# Altium PCB ad_motor.PcbDoc
Units mm, origin at the board's own origin, x right, y up, seen from the top; angles counter-clockwise.
Board outline 64.99 x 56 mm, 2 copper layers (Top Layer, Bottom Layer); 59 components, 74 nets, 303 pads, 77 vias.
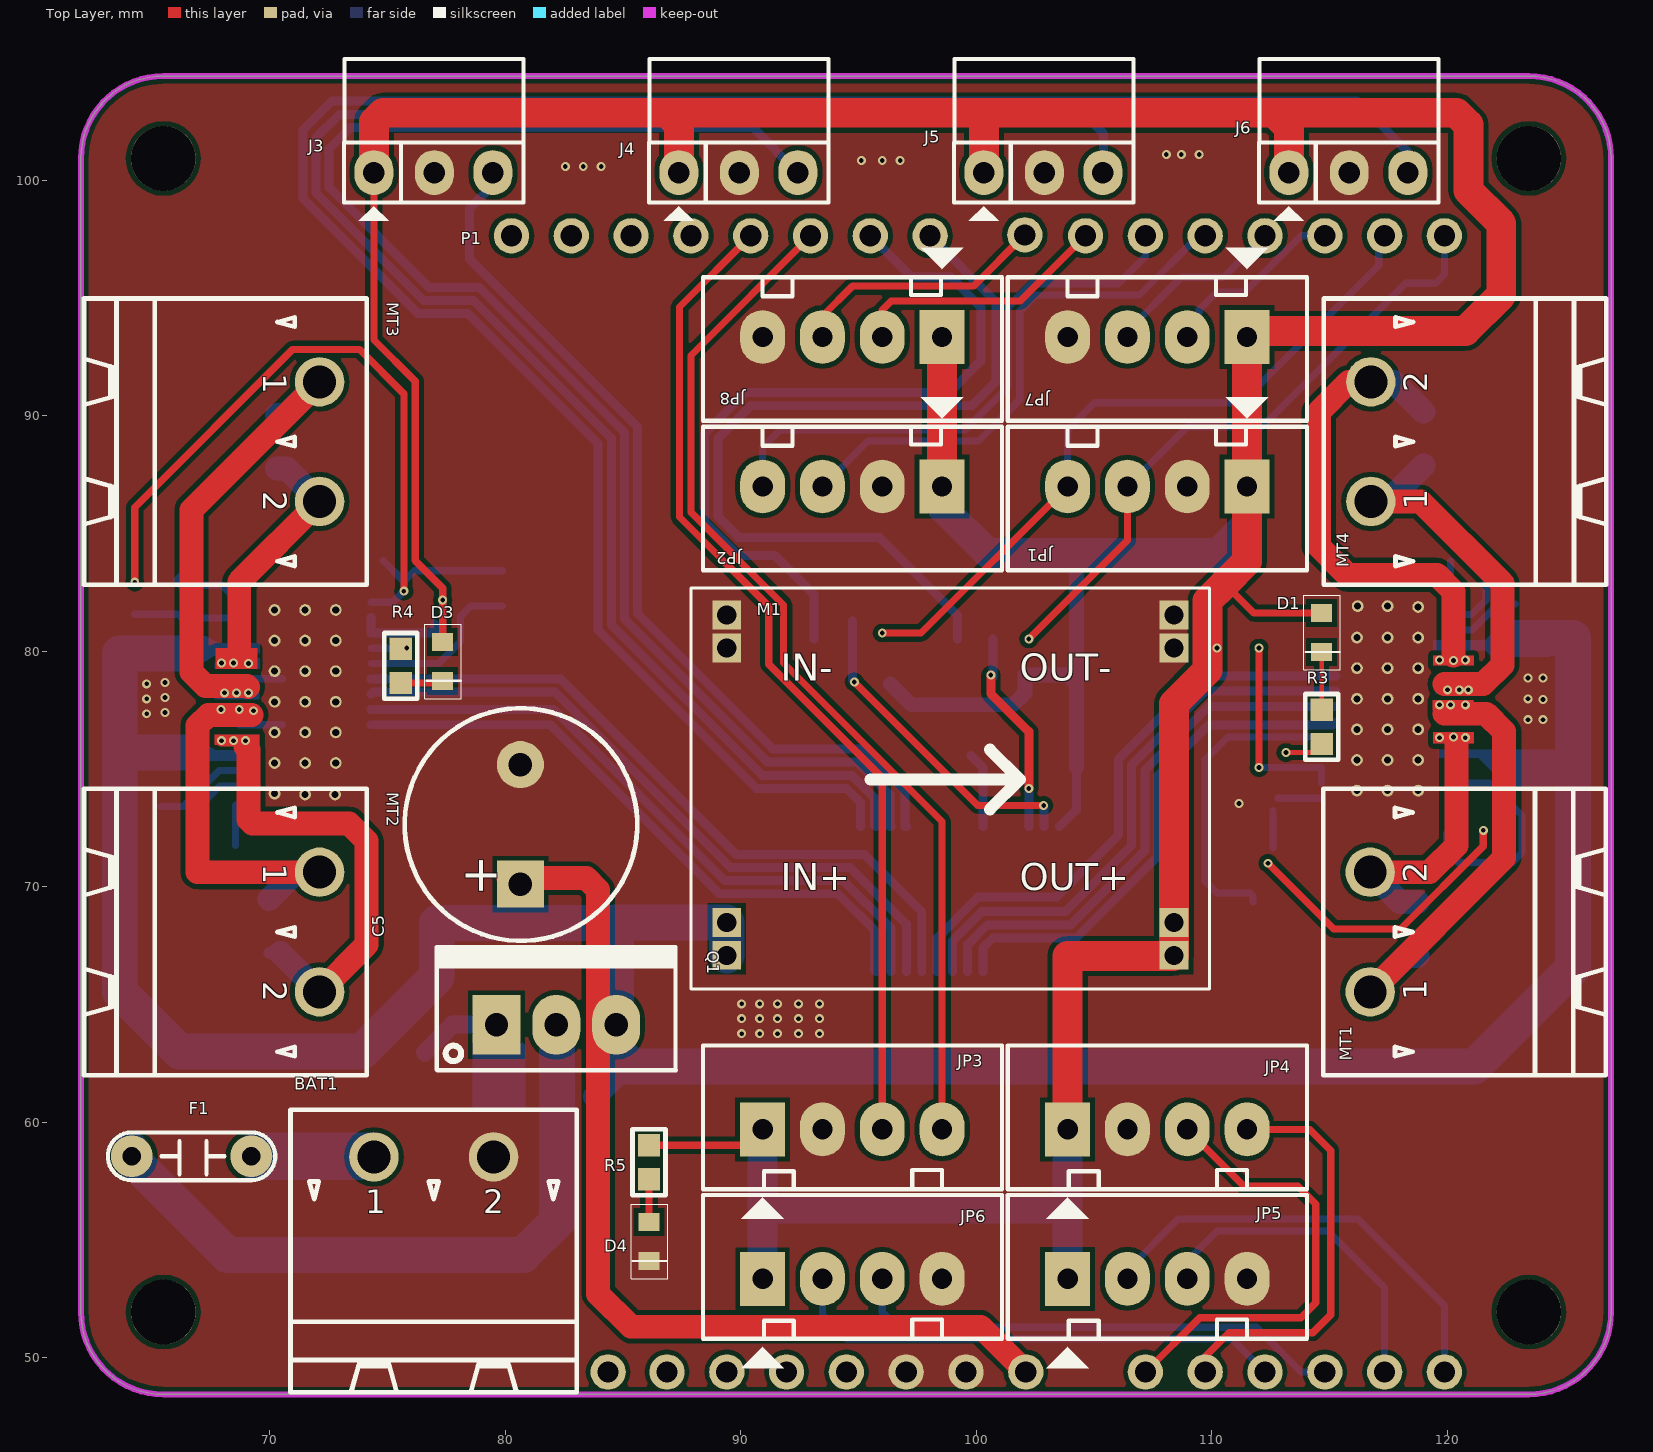
[diagram p0: Top Layer view]
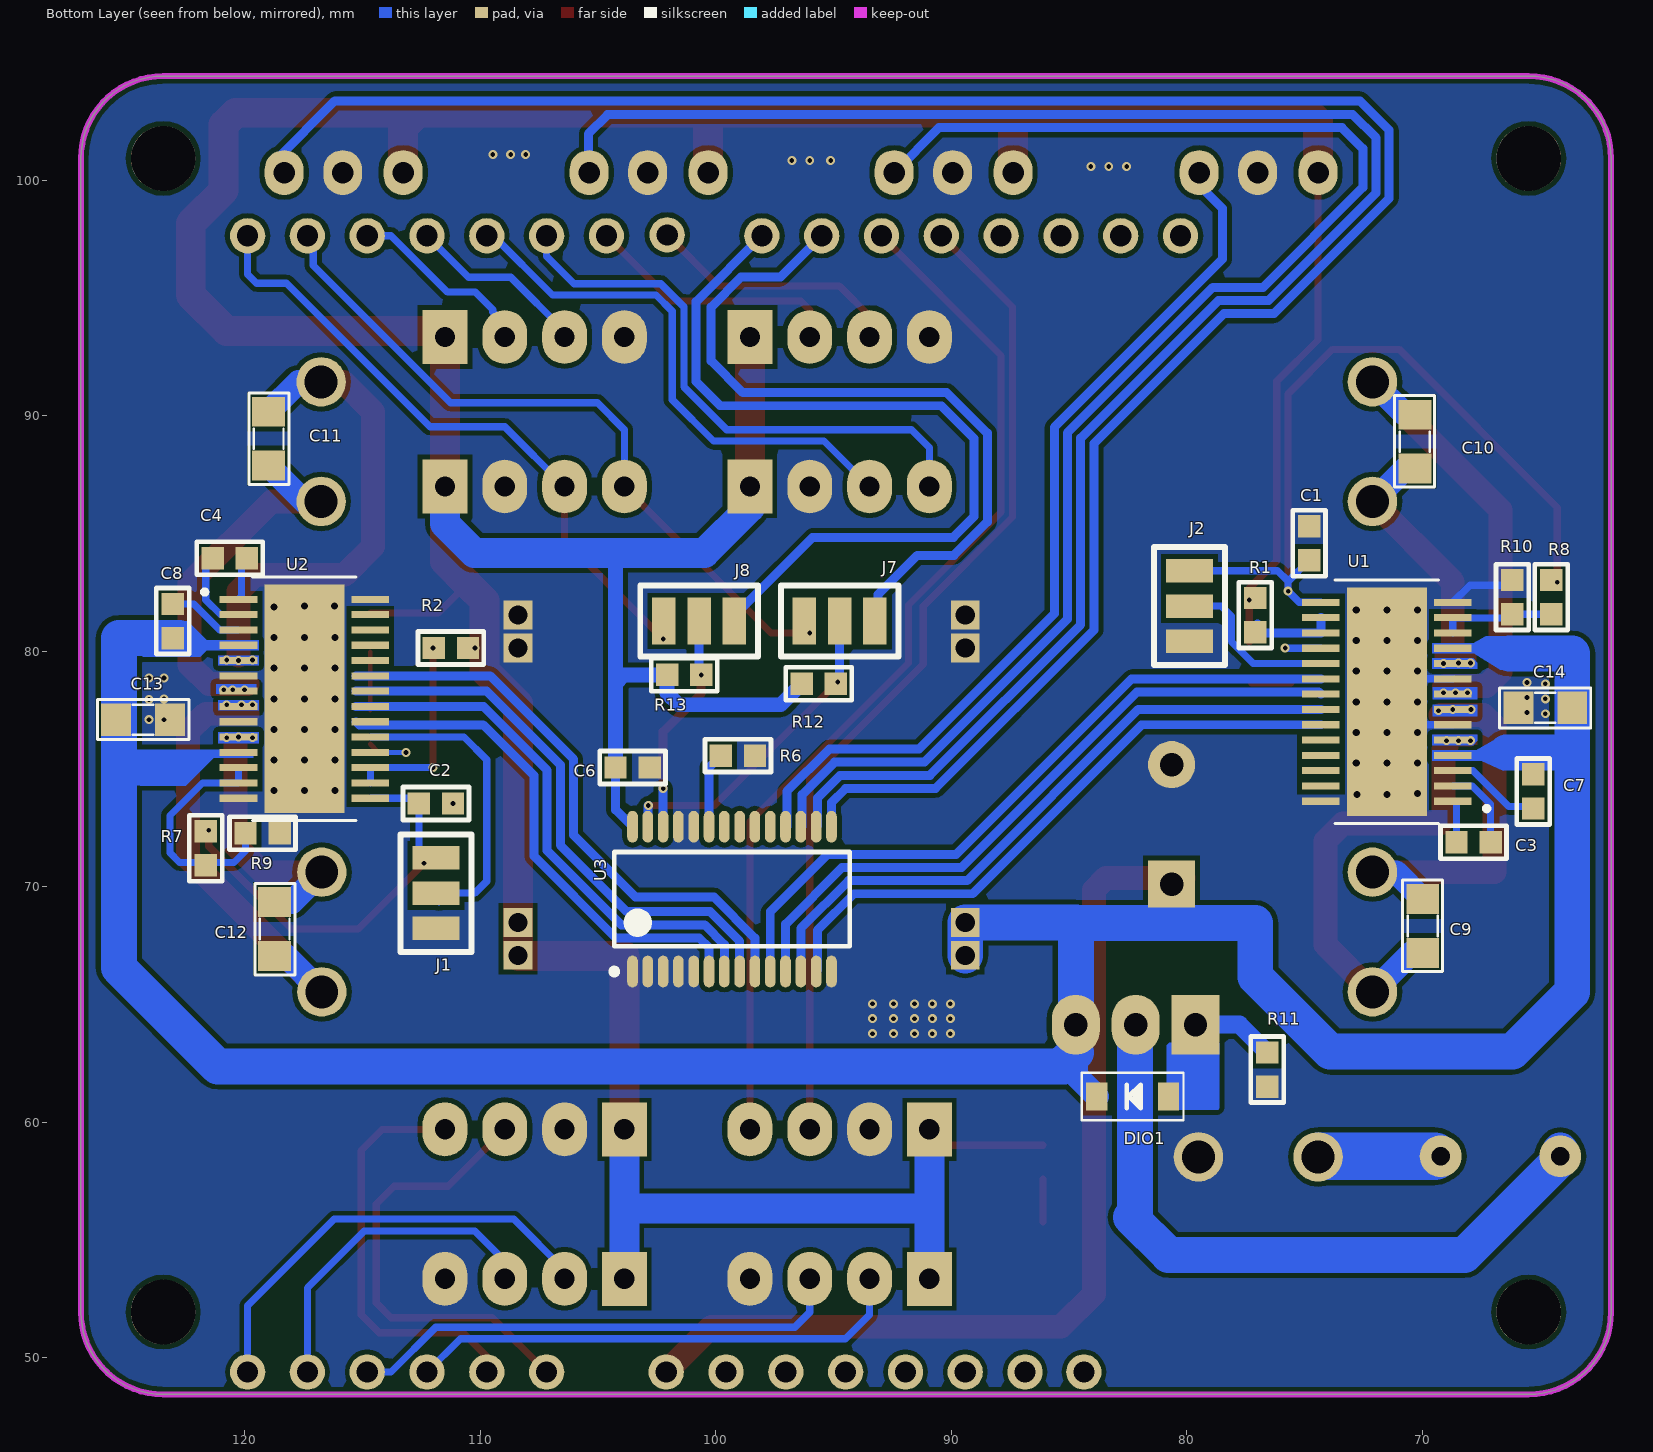
[diagram p1: Bottom Layer view, seen from below]
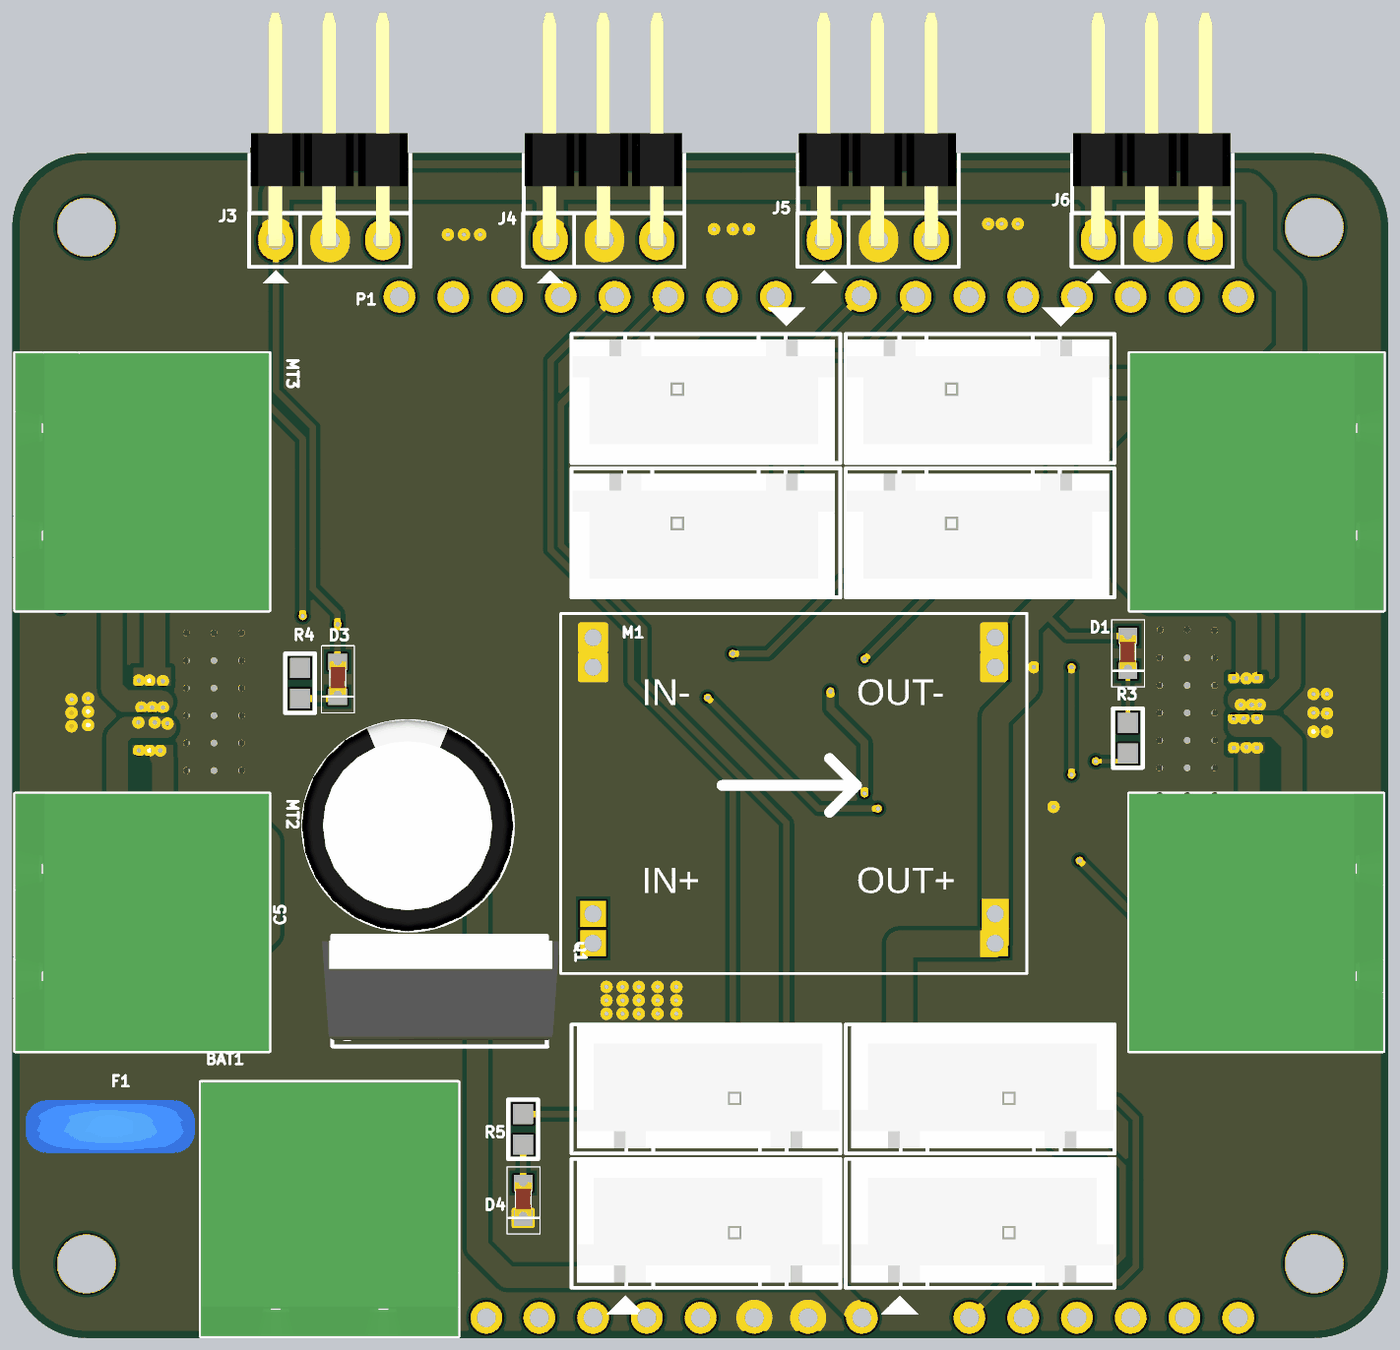
[diagram p2: 3D render of the assembled board from above, using the file's embedded part models]

## Layer stack, top to bottom
Top Solder: solder mask 0.0102, Solder Resist, Dk 3.5
Top Layer: signal copper 0.0356
Dielectric 1: dielectric 0.32, FR-4, Dk 4.8
Bottom Layer: signal copper 0.0356
Bottom Solder: solder mask 0.0102, Solder Resist, Dk 3.5

## Board outline
61.976,51.93 ccw(c65.476,51.93) 65.476,48.43 123.476,48.43 ccw(c123.472,51.926) 126.968,51.93 126.968,100.93 ccw(c123.472,100.934) 123.476,104.43 65.476,104.43 ccw(c65.476,100.93) 61.976,100.93

## Design rules (kind name [scope] priority, off if disabled: settings)
Clearance Clearance_1 [InPolygon] p1: gap=0.203
Clearance [All] p2: gap=0.178
ComponentClearance ComponentClearance_1 [InComponent('p1')] p1: gap=0 collisioncheckmode=3 verticalgap=0 showdistances=FALSE
ComponentClearance [All] p2: gap=0.254 collisioncheckmode=3 verticalgap=0.254 showdistances=FALSE
PolygonConnect [All] p1: connectstyle=Direct reliefconductorwidth=0.508 reliefentries=4 polygonreliefangle="90 Angle" airgapwidth=0.254
RoutingVias [All] p1: holewidth=0.203 width=0.381 viastyle="Through Hole" minholewidth=0.127 minwidth=0.254 maxholewidth=0.711 maxwidth=1.27
SolderMaskExpansion [All] p1: expansion=0.102
Width [All] p1: maxlimit=2.032 minlimit=0.203 preferedwidth=0.305
29 further rules are at their usual default settings.

## Classes and differential pairs
component class CONNECTORS: J7 J8 JP1 JP2 JP3 JP4 JP5 JP6 JP7 JP8 P1
component class H_BRIDGE: C1 C2 C3 C4 C5 C7 C8 C9 C10 C11 C12 C13 C14 D1 D3 J1 J2 MT1 MT2 MT3 MT4 R1 R2 R3 R4 R7 R8 R9 R10 U1 U2
component class power: BAT1 DIO1 F1 M1 Q1 R11
component class VIA_MOTORS: C6 D4 J3 J4 J5 J6 R5 R6 R12 R13 U3

## Components (designator, comment, footprint, x,y, rotation, side; value= is the part's Value field where it differs from the comment)
BAT1 "MOTOR-DC" CON2-5.08DC 74.422,58.547 r0 top locked
C1 "Cap Semi" SMT0603 74.803,84.582 r270 bottom
C2 "Cap Semi" SMT0603 111.887,73.533 r0 bottom
C3 "Cap Semi" SMT0603 67.818,71.882 r0 bottom
C4 "Cap Semi" SMT0603 120.65,83.947 r180 bottom
C5 "Cap Pol 8mm" C10mm 80.645,72.644 r90 top
C6 "Cap Semi" SMT0603 103.535,75.057 r0 bottom
C7 "Cap Semi" SMT0603 65.278,74.041 r270 bottom
C8 "Cap Semi" SMT0603 123.063,81.28 r90 bottom
C9 "104" SM-0805 69.977,68.326 r270 bottom
C10 "104" SM-0805 70.311,88.9 r270 bottom
C11 "104" SM-0805 118.999,89.027 r90 bottom
C12 "104" SM-0805 118.745,68.199 r90 bottom
C13 "104" SM-0805 124.333,77.089 r0 bottom
C14 "103" SM-0805 64.77,77.597 r180 bottom
D1 "LED2_RED" LED_RED_SMD0603 114.675,80.473 r270 top
D3 "LED2_RED" LED_RED_SMD0603 77.343,79.248 r270 top
D4 "LED2_RED" LED_RED_SMD0603 86.106,54.61 r270 top
DIO1 "Diode SMD" DIO-SMD-123 82.296,61.087 r180 bottom
F1 "5A 30V FUSE" CN2 69.215,58.547 r180 top
J1 "JUMPER-SOLDER-3WAY-BOTTOM" JUMPER-SOLDER-3WAY-BOTTOM 111.887,69.723 r270 top
J2 "JUMPER-SOLDER-3WAY-BOTTOM" JUMPER-SOLDER-3WAY-BOTTOM 79.883,81.915 r270 top
J3 "EXTERN-SERVO" JP3H 74.422,100.33 r0 top
J4 "EXTERN-SERVO" JP3H 87.376,100.33 r0 top
J5 "EXTERN-SERVO" JP3H 100.33,100.33 r0 top
J6 "EXTERN-SERVO" JP3H 113.284,100.33 r0 top
J7 "JUMPER-SOLDER-3WAY-BOTTOM" JUMPER-SOLDER-3WAY-BOTTOM 94.742,81.28 r0 top
J8 "JUMPER-SOLDER-3WAY-BOTTOM" JUMPER-SOLDER-3WAY-BOTTOM 100.711,81.28 r0 top
JP1 "JP4" CON4 111.506,86.995 r180 top
JP2 "JP4" CON4 98.552,86.995 r180 top
JP3 "JP4" CON4 90.932,59.69 r0 top
JP4 "JP4" CON4 103.886,59.69 r0 top
JP5 "JP4" CON4 103.886,53.34 r0 top
JP6 "JP4" CON4 90.932,53.34 r0 top
JP7 "JP4" CON4 111.506,93.345 r180 top
JP8 "JP4" CON4 98.552,93.345 r180 top
M1 "MP1584-dc-brick-pcb Step down Input: 4.5V - 28V Ouput 0.8V - 25V max. 3A Cheap on ebay" DC-BRICK 87.884,65.659 r0 top
MT1 "MOTOR-DC" CON2-5.08DC 116.713,65.532 r90 top
MT2 "MOTOR-DC" CON2-5.08DC 72.136,70.612 r270 top locked
MT3 "MOTOR-DC" CON2-5.08DC 72.136,91.44 r270 top locked
MT4 "MOTOR-DC" CON2-5.08DC 116.738,86.36 r90 top
P1 "ArduinoHeader" Arduino_header 100.076,73.533 r0 top locked
Q1 "A \"typical\" P chan Mosfet" QTO-220 79.629,64.135 r0 top
R1 "Resistor" SMT0603 77.089,81.534 r90 bottom
R2 "Resistor" SMT0603 111.252,80.137 r180 bottom
R3 "Resistor" SMT0603 114.675,76.783 r90 top
R4 "Resistor" SMT0603 75.565,79.375 r270 top
R5 "Resistor" SMT0603 86.106,58.293 r90 top
R6 "Resistor" SMT0603 99.06,75.565 r0 bottom
R7 "Resistor" SMT0603 121.666,71.628 r90 bottom
R8 "Resistor" SMT0603 64.516,82.296 r90 bottom
R9 "Resistor" SMT0603 119.253,72.263 r0 bottom
R10 "Resistor" SMT0603 66.167,82.296 r270 bottom
R11 "Resistor" SMT0603 76.581,62.23 r90 bottom
R12 "Resistor" SMT0603 95.631,78.613 r0 bottom
R13 "Resistor" SMT0603 101.346,78.994 r0 bottom
U1 "DRV8841PWPR" IC_TPS61196PWPRQ1 71.501,77.851 r0 bottom
U2 "DRV8841PWPR" IC_TPS61196PWPRQ1 117.475,77.978 r180 bottom
U3 "PCA9685-TSSOP28" TSSOP28-SMD 99.315,69.469 r90 bottom

## Footprints (in the part's own frame and the unit in brackets; to place one, negate y for a bottom-side part, rotate by r counter-clockwise, add the part's x,y. Pads: shape width x height; smd on the part's side, far side on the other; paste and mask are expansions set on the pad)
Arduino_header [mm] "Base for Arduino-like boards."
  round 1.5 hole 0.9: 0(19.812,24.11) 1(-15.708,-24.15) 1(17.272,24.11) 2(14.732,24.11) 3(12.192,24.11) 3v3(-8.128,-24.15) 4(9.652,24.11) 5(7.112,24.11) 5V(-5.588,-24.15) 6(4.572,24.11) 7(1.992,24.15) 8(-2.032,24.11) 9(-4.572,24.11) 10(-7.112,24.11) 11(-9.652,24.11) 12(-12.192,24.11) 13(-14.732,24.11) 14(-17.272,24.11) A0(7.112,-24.15) A1(9.652,-24.15) A2(12.192,-24.15) A3(14.732,-24.15) A4(17.272,-24.15) A5(19.812,-24.15) AREF(-19.812,24.11) GND(-3.048,-24.15) GND(-0.508,-24.15) IOREF(-13.208,-24.15) RESET(-10.668,-24.15) VIN(2.032,-24.15)
C10mm [mm]
  rect 2x2 hole 1: 1(-2.54,0)
  round 2 hole 1: 2(2.54,0)
  silkscreen extent -4.95,-4.96 4.93,4.92, body extent -5,-5 4.97,5, height 20.01
CN2 [mil]
  round 70 hole 31: 1(0,0) 2(200,0)
  silkscreen extent -40,-40 240,40, body extent -54,-44 260,55, height 407
CON2-5.08DC [mm] "PHOENIX MSTBA Serie, Pitch 5.08mm, 12A, 250V, 2 Positions Header"
  round 2.1 hole 1.4: 1(0,-0.025) 2(5.08,-0.025)
  silkscreen extent -3.54,-10.03 8.62,1.97, body extent -3.54,-10.02 8.62,1.98, height 8.6
CON4 [mil] "CON4"
  rect 75x90 hole 34: 1(0,0)
  oval 75x90 hole 34: 2(100,0) 3(200,0) 4(300,0)
  silkscreen extent -100,-150 400,140, body extent -90,-90 398,136, height 276
DC-BRICK [mil]
  rect 48x48 hole 32: 1(60,570) 1(60,625) 2(60,56) 2(60,111) 3(808,56) 3(808,111) 4(808,570) 4(808,625)
  silkscreen extent 0,0 867,670
DIO-SMD-123 [mm]
  rect 0.9x1.2 smd: 1(1.524,0) 2(-1.524,0)
  silkscreen extent -2.16,-1.02 2.16,1.02, body extent -1.76,-0.8 1.94,0.8, height 1.25
IC_TPS61196PWPRQ1 [mm]
  rect 1.6x0.3 smd paste-2 mask+0: 1(-2.8,4.225) 2(-2.8,3.575) 3(-2.8,2.925) 4(-2.8,2.275) 5(-2.8,1.625) 6(-2.8,0.975) 7(-2.8,0.325) 8(-2.8,-0.325) 9(-2.8,-0.975) 10(-2.8,-1.625) 11(-2.8,-2.275) 12(-2.8,-2.925) 13(-2.8,-3.575) 14(-2.8,-4.225) 15(2.8,-4.225) 16(2.8,-3.575) 17(2.8,-2.925) 18(2.8,-2.275) 19(2.8,-1.625) 20(2.8,-0.975) 21(2.8,-0.325) 22(2.8,0.325) 23(2.8,0.975) 24(2.8,1.625) 25(2.8,2.275) 26(2.8,2.925) 27(2.8,3.575) 28(2.8,4.225)
  round 0.5 hole 0.3 mask+0: 14(-1.3,-3.9) 14(-1.3,-2.6) 14(-1.3,-1.3) 14(-1.3,0) 14(-1.3,1.3) 14(-1.3,2.6) 14(-1.3,3.9) 14(0,-3.9) 14(0,-2.6) 14(0,-1.3) 14(0,0) 14(0,1.3) 14(0,2.6) 14(0,3.937) 14(1.27,3.937) 14(1.3,-3.9) 14(1.3,-2.6) 14(1.3,-1.3) 14(1.3,0) 14(1.3,1.3) 14(1.3,2.6)
  rect 3.4x9.7 smd paste-6 mask+0: 14(0,0)
  silkscreen extent -4.34,-5.17 2.2,5.17, body extent -3.3,-4.9 3.3,4.9, height 1.2
JP3H [mil]
  oval 65x75 hole 36: 1(0,0) 2(101,0) 3(199,0)
  silkscreen extent -50,-81 250,190, body extent -47,-15 245,424, height 99
JUMPER-SOLDER-3WAY-BOTTOM [mm] "3WAY SOLDER JUMPER BOTTOM LAYER"
  rect 1x2 smd far side: 0(-1.5,0) 1(0,0) 2(1.5,0)
LED_RED_SMD0603 [mil] "Compoment SMD 60x30mil"
  rect 30x35 smd: 1(-45,0) 2(20,0)
  silkscreen extent -75,-30 50,31, body extent -46,-16 17,16, height 24
QTO-220 [mil] "TO-220 - 1-2-3"
  rect 80x100 hole 39: 1(0,0)
  oval 80x100 hole 39: 2(100,0) 3(200,0)
  silkscreen extent -100,-76 300,130, body extent -119,-64 322,121, height 755
SM-0805 [mil] "Compoment SMD 80x50mil"
  rect 50x55 smd: 1(-45,0) 2(45,0)
  silkscreen extent -77,-34 76,33, body extent -40,-27 40,23, height 24
SMT0603 [mm]
  rect 0.95x0.95 smd: 1(-0.725,0) 2(0.725,0)
  silkscreen extent -1.4,-0.7 1.4,0.7, body extent -1.02,-0.45 1.03,0.45, height 2.65
TSSOP28-SMD [mm] "TSOP, 28-Leads, Body 9.80x4.55mm, Pitch 0.65mm, IPC Medium Density"
  oval 1.35x0.45 smd: 1(-3.075,4.225) 2(-3.075,3.575) 3(-3.075,2.925) 4(-3.075,2.275) 5(-3.075,1.625) 6(-3.075,0.975) 7(-3.075,0.325) 8(-3.075,-0.325) 9(-3.075,-0.975) 10(-3.075,-1.625) 11(-3.075,-2.275) 12(-3.075,-2.925) 13(-3.075,-3.575) 14(-3.075,-4.225) 15(3.075,-4.225) 16(3.075,-3.575) 17(3.075,-2.925) 18(3.075,-2.275) 19(3.075,-1.625) 20(3.075,-0.975) 21(3.075,-0.325) 22(3.075,0.325) 23(3.075,0.975) 24(3.075,1.625) 25(3.075,2.275) 26(3.075,2.925) 27(3.075,3.575) 28(3.075,4.225)
  silkscreen extent -3.2,-5 2,5.13, body extent -3.25,-5 3.25,5, height 1.1

## Part data
C1 C2: library part CAP-SM-0603-X5R-4.7uF, "CAP SM 0603 X5R 4.7uF 10%"
C3 C4: library part CAP-SM-0603-X5R-10uF, "CAP SM 0603 X5R 10uF 10%"
C5: "Polarized Capacitor (Axial)"
C6: library part CAP-SM-0603-X7R-1uF, "CAP SM 0603 X7R 1uF 10%"
C7 C8: library part CAP-SM-0603-X7R-100nF, "CAP SM 0603 X7R 100nF 10%"
C9 C10 C11 C12 C13 C14: library part CM, "Cap SMD"
D1 D3 D4: library part LED2_RED-0603/200mA-2V, "LED RED CLEAR 0603 SMD"
DIO1: "Default Diode"
F1: library part CN2, "Cap np 104 => 105pF"
JP1 JP2 JP3 JP4 JP5 JP6 JP7 JP8: library part Con4, "Connector 4"
M1: library part MP1584
Q1: library part IRF840, "MOSFET N - CHANNEL 500V - 0.75 - 8A - TO-220"
R1 R2 R6 R7 R8 R9 R10 R12 R13: library part RES-SM-0603-10K, "RES SM 0603 10K"
R3 R4 R5: library part RES-SM-0603-1K, "RES SM 0603 1K"
R11: library part RES-SM-0603-100K, "RES SM 0603 100K"

## Free pads (board coordinates)
  round 2.75 hole 2.75: ""(65.476,51.93) ""(65.476,100.93) ""(123.476,51.93) ""(123.476,100.93)

## Via types
v1: diameter 0.381, hole 0.203, Top Layer to Bottom Layer, 77 vias

## Nets (pads, with @x,y where several pads share a name; then routed paths per layer and width w, separated by ;. In a path a pad name is that pad's centre, name@x,y a point inside that pad or via, vN(x,y) a via of type N, cw(c..) or ccw(c..) an arc to the next point about the centre after c; other vN are vias at no path point)
3.3V_H1: C1.2 J2.0 R8.2 U1.15 | length 34.2
  Top Layer w0.305: v1(64.262,82.931) 64.262,86.106 70.976,92.82 73.804,92.82 75.692,90.932 v1(75.692,82.55)
  Bottom Layer w0.305: U1.15 75.218,82.076 v1(75.692,82.55) 75.692,82.968 ; C1.2 75.692,82.968 ; J2.0 76.139,83.415 75.692,82.968
3.3V_H2: C2.2 J1.0 R7.2 U2.15 | length 15.9
  Top Layer w0.305: v1(112.395,70.993) 115.189,68.199 118.025,68.199 121.539,71.713 v1(121.539,72.39)
  Bottom Layer w0.305: J1.0@112.612,71.654 C2.2@112.612,73.239 ; C2.2@112.832,73.753 U2.15
5V: C6.2 D1.1 D3.1 J3.1 J4.1 J5.1 J6.1 JP1.1 JP2.1 JP3.1 JP4.1 JP5.1 JP6.1 JP7.1 JP8.1 M1.3 R1.2 R2.2 R5.2 R12.2 R13.2 U3.28 | length 215.5
  Top Layer w0.305: J3.1 74.422,93.218 76.175,91.465 76.175,83.845 77.343,82.677 v1(77.343,82.169) D3.1 ; R5.2 JP3.1@90.26,59.018 ; 110.553,82.867 111.805,81.616 D1.1
  Top Layer w1.27: J3.1 74.422,102.489 74.803,102.87 86.868,102.87 ; J4.1 87.376,102.362 86.868,102.87 ; JP2.1 JP8.1 ; J5.1 100.33,102.87 ; JP4.1 103.886,67.056 108.382,67.056 108.407,67.081 108.407,68.478 108.407,77.768 109.83,79.191 109.83,82.144 110.553,82.867 111.506,83.82 JP1.1 JP7.1 111.76,93.599 120.777,93.599 122.301,95.123 122.301,98.171 120.904,99.568 120.904,102.362 120.396,102.87 112.649,102.87 ; J6.1@113.284,100.838 113.284,102.235 112.649,102.87 ; 86.868,102.87 100.33,102.87 ; 100.33,102.87 112.649,102.87
  Bottom Layer w0.381: U3.28 104.26,73.264 C6.2
  Bottom Layer w0.635: R12.2 97.245,77.724 101.571,77.724 102.071,78.224 R13.2 103.886,78.994 104.26,78.62 ; C6.2 104.26,83.909 104.521,84.17
  Bottom Layer w1.27: JP6.1 JP3.1 ; 90.983,56.337 103.886,56.337 ; JP2.1 98.552,86.106 100.488,84.17 104.521,84.17 110.261,84.17 111.506,85.416 JP1.1 ; JP5.1 103.886,56.337 ; JP4.1 103.886,56.337
  other v1: 110.227,80.137
DECAY_1: J2.1 U1.19 | length 7.2
  Bottom Layer w0.305: U1.19 77.173,79.476 78.105,80.408 78.105,81.486 78.534,81.915 J2.1
DECAY_2: J1.1 U2.19 | length 13.1
  Bottom Layer w0.305: J1.1@111.76,69.342 111.76,69.596 111.633,69.723 110.236,69.723 109.728,70.231 109.728,75.387 110.694,76.353 U2.19
GND: BAT1.2 C1.1 C2.1 C5.2 C6.1 C13.1 C14.1 D4.2 J1.2 J2.2 J3.2 J4.2 J5.2 J6.2 JP1.2 JP2.2 JP3.2 JP4.2 JP5.4 JP6.4 JP7.4 JP8.4 M1.1 M1.4 P1.GND R6.1 R9.1 R10.1 R11.1 U1.6 U1.9 U1.14 U1.28 U2.6 U2.9 U2.14 U2.28 U3.1 U3.2 U3.3 U3.4 U3.5 U3.14 U3.24 U3.25 | length 6.7
  Bottom Layer w0.305: R10.1@66.04,83.021 R10.1@66.204,83.185 ; R10.1@66.204,82.804 67.973,82.804 U1.14@68.701,82.076 ; U1.6 U1.14@70.526,76.876 ; U1.9 U1.14@70.526,78.826
  other v1: 90.043,63.754 90.805,63.754 91.567,63.754 92.456,63.754 93.345,63.754 90.043,64.389 90.805,64.389 91.567,64.389 92.456,64.389 93.345,64.389 90.043,65.024 90.805,65.024 91.567,65.024 92.456,65.024 93.345,65.024 111.162,73.533 123.444,77.089 124.079,77.089 64.77,77.343 65.551,77.399 124.079,77.953 64.77,77.978 123.444,77.978 65.551,78.034 64.77,78.613 65.551,78.669 123.444,78.867 124.079,78.867 82.55,100.584 83.312,100.584 84.074,100.584 95.123,100.838 96.012,100.838 96.774,100.838 108.077,101.092 108.712,101.092 109.474,101.092
IO0: JP7.3 P1.3 | length 7.8
  Bottom Layer w0.305: JP7.3 106.426,93.599 108.712,95.885 110.51,95.885 P1.3
IO2: JP7.2 P1.2 | length 8
  Bottom Layer w0.305: JP7.2 108.966,93.904 109.474,94.412 109.474,94.513 110.211,95.25 111.403,95.25 113.796,97.643 P1.2
IO4: JP2.3 P1.4 | length 22.9
  Bottom Layer w0.305: JP2.3 95.402,88.925 100.101,88.925 101.854,90.678 101.854,94.441 102.536,95.123 106.934,95.123 109.454,97.643 P1.4
IO5: JP3.4 P1.10 | length 44.5
  Top Layer w0.305: P1.10 87.884,92.563 87.884,85.899 91.821,81.962 91.821,79.502 98.552,72.771 JP3.4
IO12: JP6.3 P1.A3 | length 21.3
  Bottom Layer w0.305: JP6.3 96.012,51.918 96.647,51.283 111.896,51.283 113.796,49.383 P1.A3
IO13: JP5.3 P1.A4 | length 14.2
  Bottom Layer w0.305: JP5.3 108.966,54.102 110.236,55.372 114.935,55.372 117.348,52.959 P1.A4
IO14: JP6.2 P1.A2 | length 21.3
  Bottom Layer w0.305: JP6.2 93.472,51.816 94.488,50.8 110.851,50.8 P1.A2
IO15: JP5.2 P1.A5 | length 19.1
  Bottom Layer w0.305: JP5.2 106.426,53.721 108.585,55.88 116.205,55.88 119.888,52.197 P1.A5
IO16: P1.14
IO17: P1.AREF
IO18: P1.13
IO19: P1.12
IO21: J7.0 P1.9 | length 32.8
  Bottom Layer w0.381: J7.0@93.115,80.518 93.115,82.399 91.44,84.074 89.888,84.074 88.468,85.494 88.468,89.258 90.193,90.983 98.857,90.983 100.203,92.329 100.203,94.615 98.933,95.885 97.262,95.885 P1.9
IO22: J8.0 P1.8 | length 36.4
  Bottom Layer w0.381: P1.8 100.838,94.849 100.838,91.445 99.817,90.424 90.424,90.424 89.027,89.027 89.027,85.725 89.916,84.836 95.885,84.836 99.211,81.51 J8.0@99.211,80.518
IO23: JP3.3 P1.11 | length 42.8
  Top Layer w0.305: P1.11 87.401,94.62 87.401,85.7 91.193,81.908 91.193,79.448 96.012,74.629 JP3.3
IO25: JP2.4 P1.5 | length 24.1
  Bottom Layer w0.305: JP2.4 90.932,88.646 91.694,89.408 99.538,89.408 101.359,91.229 101.359,94.628 102.337,95.606 106.02,95.606 107.188,96.774 P1.5
IO26: JP8.2 P1.6 | length 11.1
  Top Layer w0.305: JP8.2 96.012,94.488 96.393,94.869 101.874,94.869 P1.6
IO27: JP8.3 P1.7 | length 10.9
  Top Layer w0.305: JP8.3 93.472,94.234 94.742,95.504 99.889,95.504 P1.7
IO34: J8.2 JP1.3 P1.0 | length 27.1
  Top Layer w0.305: v1(102.235,80.518) 106.426,84.709 JP1.3
  Bottom Layer w0.305: J8.2@102.211,80.518 v1(102.235,80.518) ; JP1.3 108.966,89.535 112.141,89.535 118.237,95.631 119.507,95.631 119.888,96.012 P1.0
IO35: J7.2 JP1.4 P1.1@117.348,97.643 | length 30.3
  Top Layer w0.305: v1(96.012,80.772) 97.663,80.772 JP1.4
  Bottom Layer w0.305: JP1.4 103.886,89.408 105.029,90.551 111.274,90.551 117.099,96.376 117.099,97.394 P1.1@117.348,97.643
IO36: JP4.3 P1.A0 | length 19.4
  Top Layer w0.305: P1.A0 109.494,51.689 113.792,51.689 114.427,52.324 114.427,56.515 113.665,57.277 111.379,57.277 JP4.3
IO39: JP4.4 P1.A1 | length 17.6
  Top Layer w0.305: P1.A1 109.728,50.038 110.744,51.054 114.3,51.054 115.062,51.816 115.062,58.796 114.168,59.69 JP4.4
LED_FAULT_1: R4.1 U1.18 | length 1.5
  Bottom Layer w0.305: U1.18 75.808,80.126 v1(75.819,80.137)
LED_FAULT_2: R3.1 U2.18 | length 3.2
  Top Layer w0.203: v1(113.157,75.692) 114.309,75.692 R3.1
  Bottom Layer w0.203: v1(113.157,75.692) 114.664,75.692 U2.18
M1_OUT_A: C9.2 MT2.2 U1.5 | length 19.7
  Top Layer w0.508: v1(67.952,76.2) v1@69.088,76.2
  Top Layer w1.016: 68.961,75.946 69.088,75.819 69.088,72.86 69.267,72.681 73.369,72.681 74.111,71.939 74.111,67.532 MT2.2
  Bottom Layer w0.508: C9.2 C9.2@70.46,67.183
  Bottom Layer w1.016: C9.2@70.46,67.183 MT2.2
  other v1: 68.453,76.2 68.961,76.2
M1_OUT_B: C9.1 MT2.1 U1.7 | length 16.5
  Top Layer w1.016: 69.215,77.292 67.386,77.292 66.929,76.835 66.929,70.612 MT2.1
  Bottom Layer w1.016: C9.1 71.12,70.612 MT2.1
  other v1: 69.301,77.47 67.926,77.526 68.701,77.526
M2_OUT_A: C10.2 MT3.2 U1.10 | length 11.8
  Top Layer w0.381: v1(67.945,79.502) 69.29,79.502
  Top Layer w1.016: 68.701,80.091 68.701,82.95 MT3.2
  Bottom Layer w1.016: C10.2 70.714,87.757 MT3.2 MT3.2@71.708,86.36
  other v1: 69.088,79.476 68.453,79.502
M2_OUT_B: C10.1 MT3.1 U1.8 | length 19.6
  Top Layer w1.016: 69.07,78.486 69.029,78.527 67.269,78.527 66.675,79.121 66.675,86.004 MT3.1
  Bottom Layer w1.016: C10.1 70.714,90.043 MT3.1
  other v1: 68.072,78.232 68.58,78.232 69.088,78.232
M3_OUT_A: C11.2 MT4.2 U2.5 | length 20.4
  Top Layer w1.016: MT4.2 115.824,91.44 114.554,90.17 114.554,84.455 115.762,83.247 119.572,83.247 120.275,82.544 120.275,79.823
  Bottom Layer w1.016: MT4.2 117.729,91.44 C11.2
  other v1: 120.275,79.603 119.675,79.629 120.777,79.629
M3_OUT_B: C11.1 MT4.1 U2.7 | length 16.2
  Top Layer w1.016: MT4.1 118.872,86.36 122.347,82.885 122.347,79.421 121.53,78.604 119.888,78.604
  Bottom Layer w1.016: MT4.1 117.475,86.36 C11.1
  other v1: 120.015,78.359 120.523,78.359 120.904,78.359
M4_OUT_A: C12.2 MT1.2 U2.10 | length 10.9
  Top Layer w1.016: MT1.2 119.253,70.612 120.396,71.755 120.396,76.012
  Bottom Layer w1.016: MT1.2 118.008,69.342 C12.2
  other v1: 119.675,76.327 120.777,76.327 120.275,76.353
M4_OUT_B: C12.1 MT1.1 U2.8 | length 18.9
  Top Layer w1.016: MT1.1 122.428,71.222 122.428,76.581 121.666,77.343 119.888,77.343
  Bottom Layer w1.016: MT1.1 118.262,67.056 C12.1
  other v1: 119.675,77.724 120.142,77.724 120.777,77.724
MOTOR1_A: U1.21 U3.11 | length 28.9
  Bottom Layer w0.381: U1.21 74.392,78.267 82.106,78.267 89.558,70.815 94.637,70.815 97.04,68.412 U3.11
MOTOR1_B: U1.20 U3.10 | length 30
  Bottom Layer w0.381: U1.20 82.337,78.826 89.789,71.374 95.25,71.374 97.69,68.934 U3.10
MOTOR2_A: U1.22 U3.12 | length 27.8
  Bottom Layer w0.381: U1.22 82.056,77.526 89.326,70.256 94.364,70.256 96.39,68.231 U3.12
MOTOR2_B: U1.23 U3.13 | length 26.8
  Bottom Layer w0.381: U1.23 81.916,76.876 89.095,69.698 94.132,69.698 95.683,68.147 95.683,66.451 U3.13
MOTOR3_A: U2.21 U3.7 | length 23
  Bottom Layer w0.381: U3.7 99.64,67.537 100.48,68.377 104.013,68.377 107.163,71.527 107.163,74.943 109.872,77.653 U2.21 U2.21@115.275,77.653
MOTOR3_B: U2.20 U3.6 | length 22
  Bottom Layer w0.381: U3.6 100.29,67.397 100.711,67.818 104.244,67.818 107.721,71.295 107.721,74.712 109.883,76.874 114.891,76.874 114.893,76.871 115.143,76.871 U2.20@115.275,77.003
MOTOR4_A: U2.22 U3.8 | length 24
  Bottom Layer w0.381: U3.8 98.99,67.677 100.248,68.936 103.781,68.936 106.604,71.758 106.604,75.175 109.732,78.303 U2.22 U2.22@115.275,78.303
MOTOR4_B: U2.23 U3.9 | length 24.9
  Bottom Layer w0.381: U3.9 98.34,67.817 100.076,69.554 103.412,69.554 106.045,72.187 106.045,75.406 109.592,78.953 U2.23 U2.23@115.275,78.953
NetBAT1_1: BAT1.1 F1.1 | length 5
  Bottom Layer w2.032: F1.1@69.469,58.547 74.397,58.547 BAT1.1
NetC3_1: C3.1 U1.2 | length 3.7
  Bottom Layer w0.305: C3.1@67.093,71.755 67.093,73.497 67.872,74.276 U1.2
NetC3_2: C3.2 U1.1 | length 1.7
  Bottom Layer w0.305: C3.2@68.543,71.755 68.543,73.468
NetC4_1: C4.1 U2.2 | length 3.7
  Bottom Layer w0.305: U2.2 121.042,81.553 121.666,82.177 121.666,84.025 121.548,83.907 C4.1@121.548,83.947
NetC4_2: C4.2 U2.1 | length 1.7
  Bottom Layer w0.305: C4.2@120.142,83.82 120.142,82.336 U2.1
NetC7_2: C7.2 U1.3 | length 4
  Bottom Layer w0.305: C7.2@65.368,73.406 66.319,73.406 67.839,74.926 U1.3
NetC8_2: C8.2 U2.3 | length 3.1
  Bottom Layer w0.305: U2.3 121.074,80.903 122.176,82.005 C8.2@122.899,82.005
NetD1_2: D1.2 R3.2 | length 2.5
  Top Layer w0.203: R3.2 D1.2
NetD3_2: D3.2 R4.2 | length 1.7
  Top Layer w0.305: R4.2 D3.2@77.253,78.65
NetD4_1: D4.1 R5.1 | length 1.8
  Top Layer w0.305: D4.1 R5.1
NetDIO1_1: DIO1.1 Q1.1 R11.2 | length 5.4
  Bottom Layer w0.762: R11.2 77.761,64.135 Q1.1
  Bottom Layer w1.27: 79.629,62.23 Q1.1
NetF1_2: F1.2 Q1.2 | length 29
  Bottom Layer w1.524: F1.2@64.135,58.801 64.135,58.42 68.199,54.356 80.772,54.356 82.372,55.956 ; 82.194,56.134 Q1.2@82.194,64.135
NETLABEL30: U3.19
NETLABEL31: U3.20
NETLABEL32: U3.21
NETLABEL33: U3.22
NetR1_1: R1.1 U1.16 U1.17 | length 3.7
  Bottom Layer w0.381: U1.16 U1.17 76.999,80.776 R1.1@76.999,81.153
NetR2_1: R2.1 U2.16 U2.17 | length 8.3
  Top Layer w0.305: v1(112.014,75.057) v1(112.014,80.137)
  Bottom Layer w0.305: R2.1 v1(112.014,80.137) ; v1@112.104,75.057 114.675,75.057 U2.16
NetR6_2: R6.2 U3.23 | length 3.2
  Bottom Layer w0.381: R6.2 100.29,75.06 U3.23
REF_H1: R8.1 R10.2 U1.12 U1.13 | length 4.9
  Bottom Layer w0.305: R8.1@64.262,81.571 R10.2@66.04,81.571 ; R10.2@66.257,81.407 68.701,81.407 U1.12
REF_H2: R7.1 R9.2 U2.12 U2.13 | length 10
  Bottom Layer w0.305: R9.2 119.978,71.517 120.465,71.03 122.784,71.03 123.19,71.436 123.19,73.02 121.807,74.403 U2.13 U2.12
SCL: J8.1 R13.1 U3.26 | length 8.9
  Top Layer w0.381: v1(100.621,78.994) 100.621,78.195 102.235,76.581 v1(102.235,74.168)
  Bottom Layer w0.381: v1(100.621,78.994) 100.711,78.904 J8.1@100.711,80.518 ; v1(102.235,74.168) 102.24,74.163 U3.26
SDA: J7.1 R12.1 U3.27 | length 13.6
  Top Layer w0.305: v1(94.824,78.695) 100.069,73.45 v1(102.87,73.45)
  Bottom Layer w0.381: R12.1@94.742,78.777 J7.1 ; v1(102.87,73.45) 102.89,73.431 U3.27
SERVO_1: J6.3 U3.15 | length 91.8
  Bottom Layer w0.381: U3.15 95.09,73.566 94.488,74.168 90.678,74.168 83.947,80.899 83.947,88.815 78.427,94.336 76.296,94.336 71.399,99.232 71.399,102.133 72.644,103.378 116.18,103.378 J6.3@118.72,100.838
SERVO_2: J5.3 U3.16 | length 78.4
  Bottom Layer w0.381: U3.16 95.683,72.601 95.683,73.763 94.719,74.727 90.909,74.727 84.506,81.13 84.506,89.047 78.658,94.894 76.527,94.894 71.958,99.464 71.958,101.803 72.949,102.794 104.593,102.794 105.41,101.977 J5.3@105.41,100.33
SERVO_3: J4.3 U3.17 | length 63.3
  Bottom Layer w0.381: J4.3 90.526,102.235 73.406,102.235 72.517,101.346 72.517,99.695 76.759,95.453 78.89,95.453 85.065,89.278 85.065,81.362 91.141,75.286 94.951,75.286 96.333,73.904 96.333,72.544 U3.17
SERVO_4: J3.3 U3.18 | length 38.1
  Bottom Layer w0.381: J3.3 79.477,99.797 78.486,98.806 78.486,96.647 85.623,89.51 85.623,81.593 91.372,75.844 95.182,75.844 96.983,74.044 96.983,72.544 U3.18
VIN: C5.1 C7.1 C8.1 C13.2 C14.2 DIO1.2 M1.2 P1.VIN Q1.3 U1.4 U1.11 U2.4 U2.11 | length 161.7
  Top Layer w1.016: C5.1@80.137,70.358 83.439,70.358 83.947,69.85 83.947,52.705 85.344,51.308 100.183,51.308 P1.VIN
  Bottom Layer w1.016: DIO1.2 84.709,61.976 84.709,62.954 Q1.3 ; 85.217,62.357 85.217,62.522
  Bottom Layer w1.524: 63.881,75.692 66.421,75.692 ; 66.294,79.902 63.627,79.902 C14.2 63.627,65.532 66.167,62.992 73.914,62.992 77.089,66.167 77.089,68.453 84.48,68.453 84.709,68.224 ; Q1.3@84.455,64.135 84.709,64.389 84.709,68.224 ; Q1.3@84.709,62.954 85.217,62.522 ; 85.217,62.357 121.158,62.357 125.356,66.555 125.356,75.057 ; M1.2@89.408,67.081 89.408,68.478 84.709,68.478 84.709,68.224 ; C8.1@122.809,80.555 125.356,80.555 125.356,75.057 ; 122.936,75.057 125.356,75.057
pads on no net: P1.1@84.368,49.383 P1.3v3 P1.5V P1.IOREF P1.RESET U1.24 U1.25 U1.26 U1.27 U2.24 U2.25 U2.26 U2.27

## Polygon pours and split planes (outlines as drawn)
GND on Top Layer "Bottom Layer-No Net" (solid, remove dead copper, pour order 0): 61.595,104.775 127,104.775 127,48.26 61.849,48.26
GND on Bottom Layer "Bottom Layer-No Net" (solid, remove dead copper, pour order 2): 61.849,104.521 127,104.521 127,48.387 61.849,48.387

## Keep-outs
Keep-Out Layer:
  the board outline again, w0.254

## Other copper
Top Layer:
  rectangle net M1_OUT_A: 67.651,76.006 69.571,76.454
  rectangle net M2_OUT_A: 67.691,79.248 69.469,80.126
  rectangle net M3_OUT_A: 119.405,79.383 121.145,79.823
  region net M4_OUT_B: 121.133,77.918 119.393,77.918 119.393,77.478 121.133,77.478
  rectangle net M4_OUT_A: 119.405,76.073 121.145,76.573
Bottom Layer:
  rectangle net M1_OUT_B: 67.651,77.216 69.571,77.746
  rectangle net M2_OUT_B: 67.831,77.956 69.571,78.396
  rectangle net M3_OUT_A: 119.405,79.383 121.145,79.823
  rectangle net M4_OUT_B: 119.405,77.478 121.145,77.918
  rectangle net M4_OUT_A: 119.405,76.073 121.145,76.573
  rectangle net M3_OUT_B: 119.5,78.178 121.24,78.613
  rectangle net M2_OUT_B: 67.651,77.956 69.571,78.486
  region net NetDIO1_1: 78.613,63.373 80.741,63.373 80.848,63.266 80.848,60.573 80.899,60.522 78.67,60.522 78.613,60.579
  region net VIN: 119.405,80.473 121.621,80.473 122.428,81.28 124.333,81.28 124.333,79.756 121.904,79.756 121.63,80.03 119.405,80.03
  region net VIN: 119.642,75.819 124.452,75.819 124.452,74.295 122.506,74.295 121.327,75.474 119.642,75.474
  region net VIN: 69.571,80.347 69.571,79.906 67.801,79.906 66.684,79.215 64.188,79.215 63.627,80.645 67.31,80.645 67.828,80.347
  region net M2_OUT_A: 67.651,79.516 67.831,79.696 69.571,79.696 69.571,79.256 67.651,79.248
  region net M1_OUT_A: 67.651,76.454 67.651,76.186 67.831,76.006 69.571,76.006 69.571,76.446
  region net VIN: 69.571,75.796 69.571,75.356 67.482,75.356 66.548,74.93 66.421,75.184 66.421,76.073 66.294,76.2 66.548,76.454 67.704,75.796

## Text inside footprints (layer, text, board x,y; h text height)
BAT1: Top Overlay "2" at 79.062,56.122 h1; Top Overlay "1" at 74.062,56.122 h1
C5: Top Overlay "+" at 79.629,69.596 h1.52 r90
M1: Top Overlay "OUT-" at 101.854,78.359 h1.97; Top Overlay "OUT+" at 101.854,69.469 h1.97; Top Overlay "IN-" at 91.694,78.359 h1.97; Top Overlay "IN+" at 91.694,69.469 h1.97
MT1: Top Overlay "2" at 119.138,70.172 h1 r90; Top Overlay "1" at 119.138,65.172 h1 r90
MT2: Top Overlay "2" at 69.711,65.972 h1 r270; Top Overlay "1" at 69.711,70.972 h1 r270
MT3: Top Overlay "2" at 69.711,86.8 h1 r270; Top Overlay "1" at 69.711,91.8 h1 r270
MT4: Top Overlay "2" at 119.163,91 h1 r90; Top Overlay "1" at 119.163,86 h1 r90